# Altium PCB MP3_PCB.PcbDoc
Units mil, origin at the board's own origin, x right, y up, seen from the top; angles counter-clockwise.
Board outline 6000 x 4000 mil, 2 copper layers (Top Layer, Bottom Layer); 1 components, 0 nets, 64 pads, 0 vias.
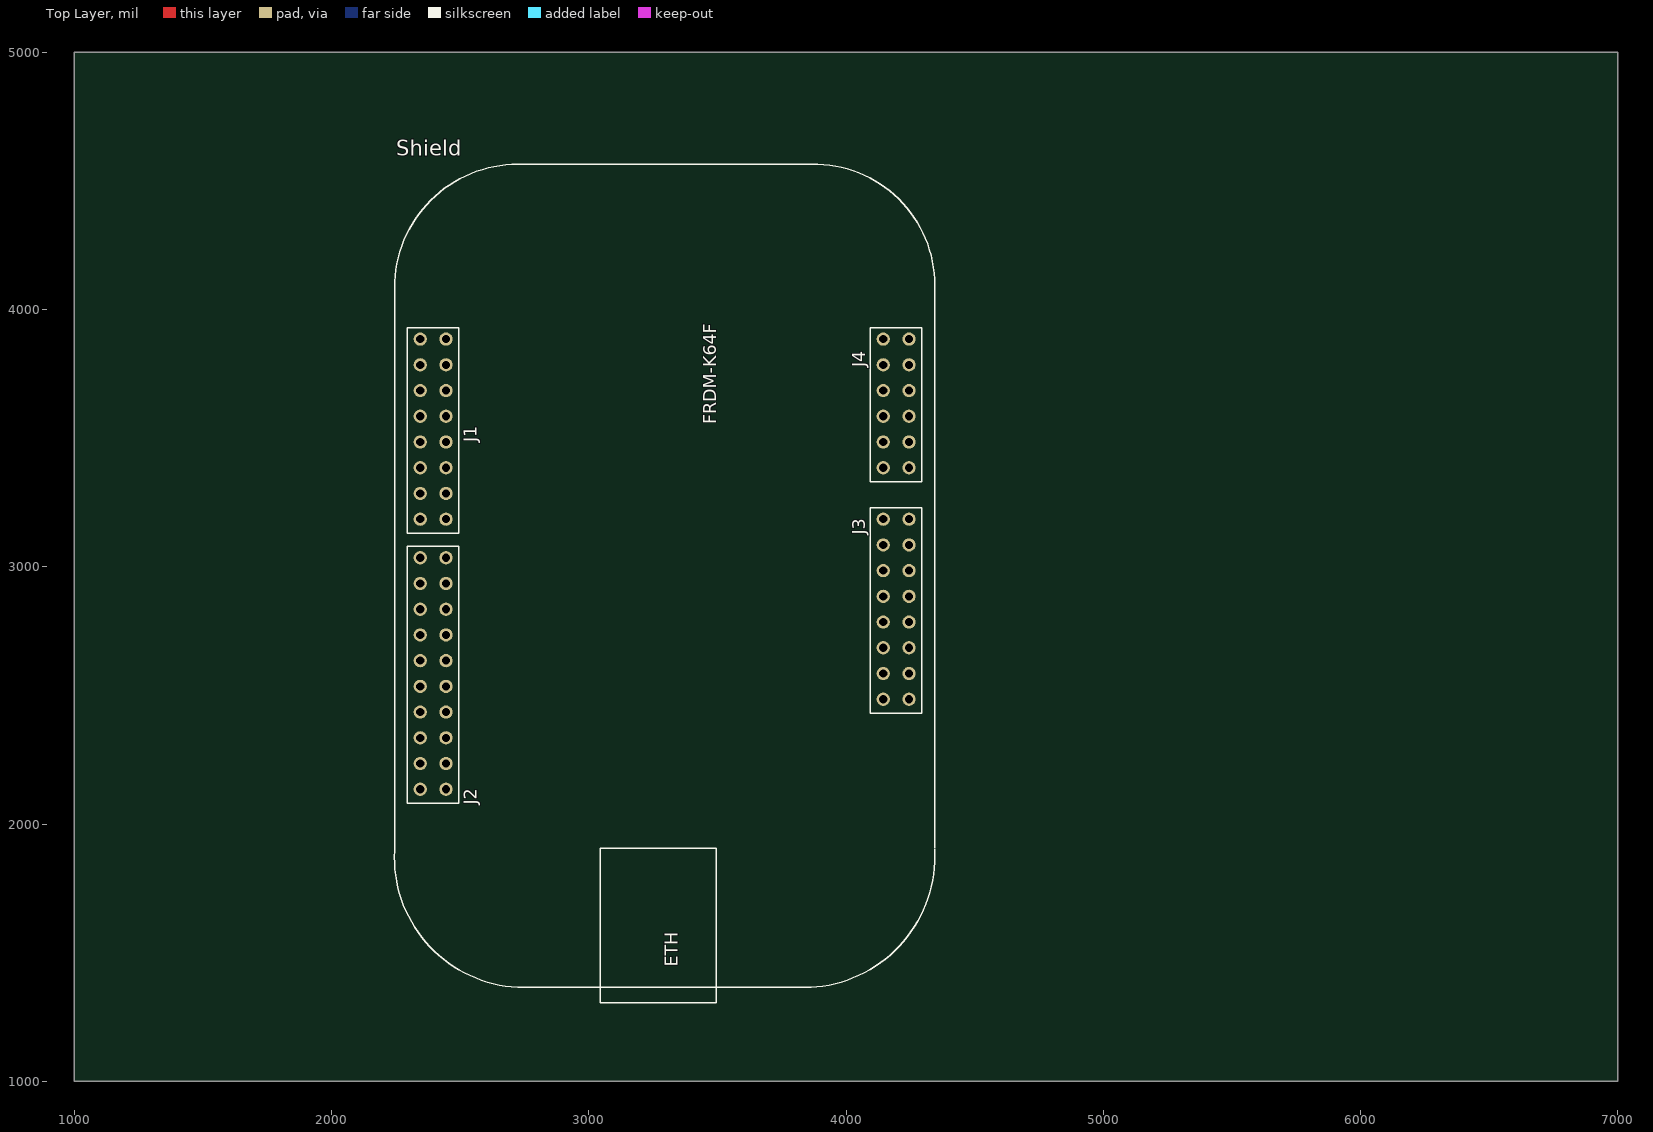
[diagram p0: Top Layer view]
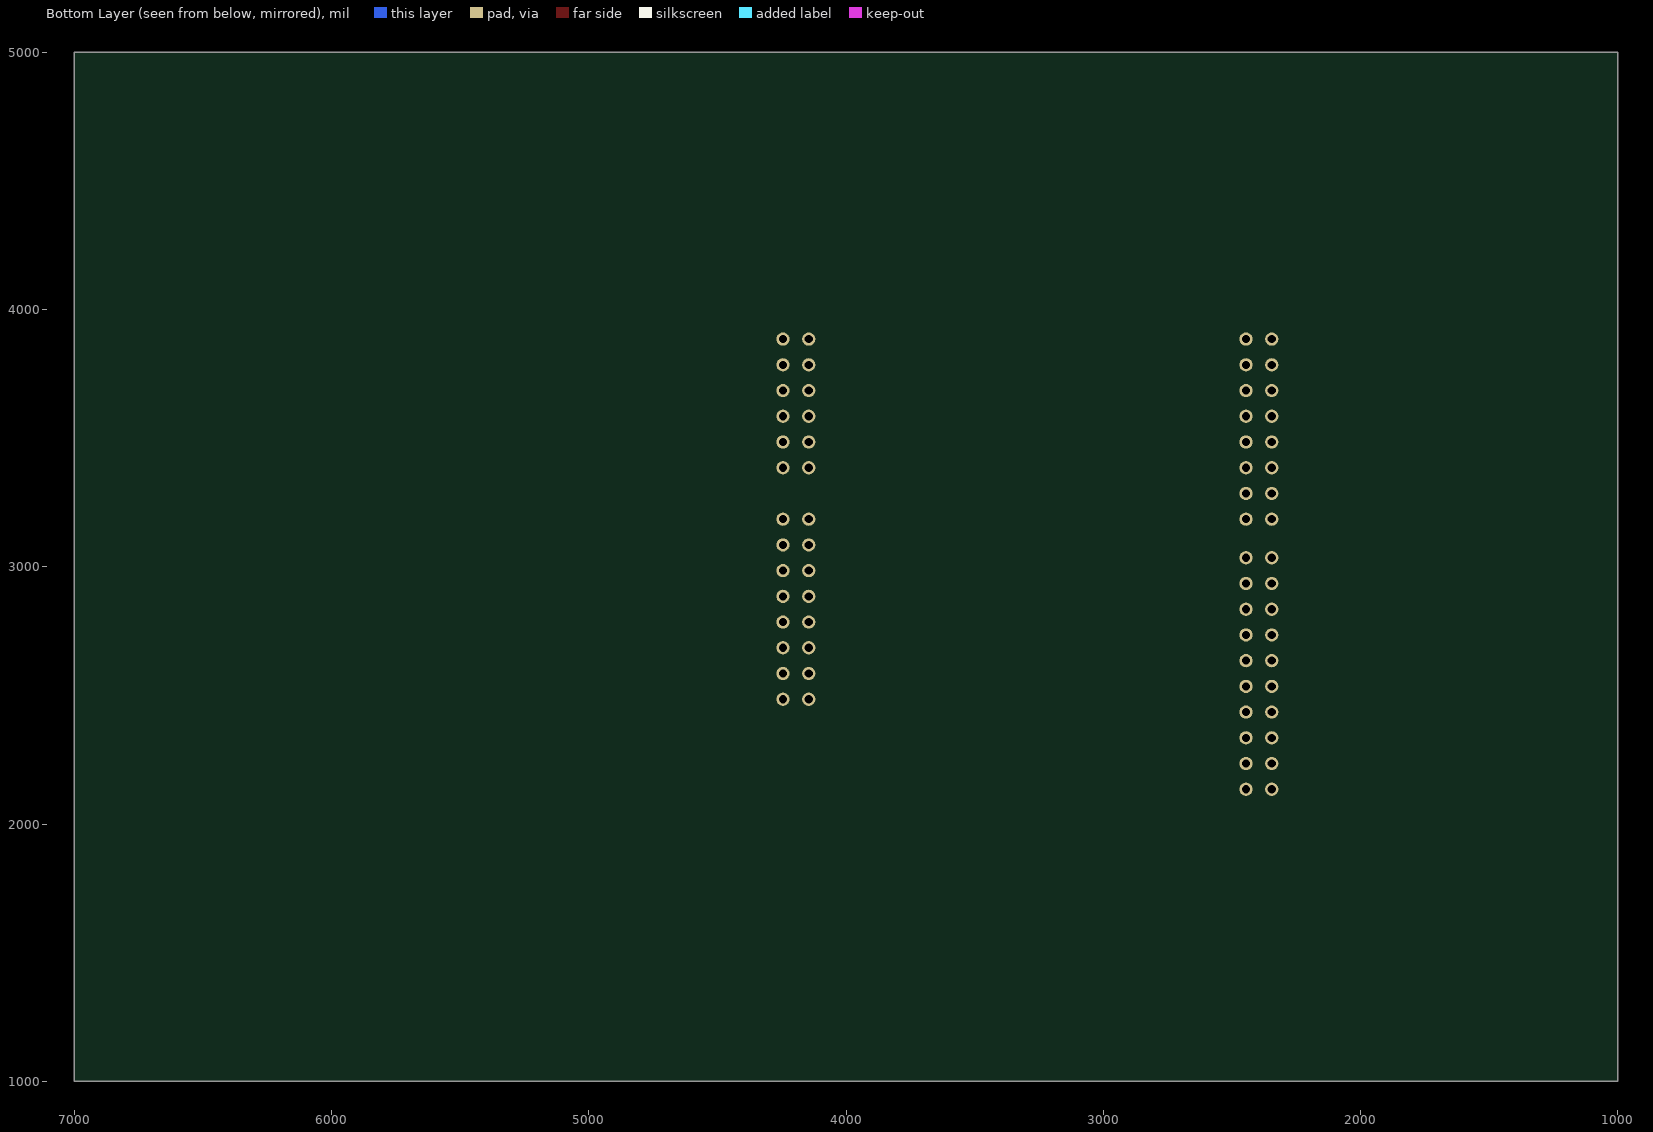
[diagram p1: Bottom Layer view, seen from below]

## Layer stack, top to bottom
Top Solder: solder mask 0.4, Solder Resist, Dk 3.5
Top Layer: signal copper 1.4
Dielectric 1: dielectric 12.6, FR-4, Dk 4.8
Bottom Layer: signal copper 1.4
Bottom Solder: solder mask 0.4, Solder Resist, Dk 3.5

## Board outline
1000,1000 7000,1000 7000,5000 1000,5000

## Design rules (kind name [scope] priority, off if disabled: settings)
Clearance [All] p1: gap=10 ignorepadtopadclearanceinfootprint=FALSE except(0: Arc-Hole Track-Hole SMDPad-Hole THPad-Hole Via-Hole Fill-Hole Poly-Hole Region-Hole Text-Hole)
PolygonConnect [All] p1: connectstyle=Relief reliefconductorwidth=10 reliefentries=4 polygonreliefangle="90 Angle" airgapwidth=10
RoutingVias [All] p1: holewidth=28 width=50 viastyle="Through Hole" minholewidth=28 minwidth=50 maxholewidth=28 maxwidth=50
SolderMaskExpansion [All] p1: expansion=4 istentingtop=FALSE
Width [All] p1: maxlimit=10 minlimit=10 preferedwidth=10
30 further rules are at their usual default settings.

## Components (designator, comment, footprint, x,y, rotation, side; value= is the part's Value field where it differs from the comment)
Shield "FRDM-K64F" FRDM-K64F 3295,2955 r90 top

## Footprints (in the part's own frame and the unit in brackets; to place one, negate y for a bottom-side part, rotate by r counter-clockwise, add the part's x,y. Pads: shape width x height; smd on the part's side, far side on the other; paste and mask are expansions set on the pad)
FRDM-K64F [mil]
  round 51.5 hole 31.5: J1-1(930,850) J1-2(930,950) J1-3(830,850) J1-4(830,950) J1-5(730,850) J1-6(730,950) J1-7(630,850) J1-8(630,950) J1-9(530,850) J1-10(530,950) J1-11(430,850) J1-12(430,950) J1-13(330,850) J1-14(330,950) J1-15(230,850) J1-16(230,950) J2-1(80,850) J2-2(80,950) J2-3(-20,850) J2-4(-20,950) J2-5(-120,850) J2-6(-120,950) J2-7(-220,850) J2-8(-220,950) J2-9(-320,850) J2-10(-320,950) J2-11(-420,850) J2-12(-420,950) J2-13(-520,850) J2-14(-520,950) J2-15(-620,850) J2-16(-620,950) J2-17(-720,850) J2-18(-720,950) J2-19(-820,850) J2-20(-820,950) J3-1(-470,-850) J3-2(-470,-950) J3-3(-370,-850) J3-4(-370,-950) J3-5(-270,-850) J3-6(-270,-950) J3-7(-170,-850) J3-8(-170,-950) J3-9(-70,-850) J3-10(-70,-950) J3-11(30,-850) J3-12(30,-950) J3-13(130,-850) J3-14(130,-950) J3-15(230,-850) J3-16(230,-950) J4-1(430,-850) J4-2(430,-950) J4-3(530,-850) J4-4(530,-950) J4-5(630,-850) J4-6(630,-950) J4-7(730,-850) J4-8(730,-950) J4-9(830,-850) J4-10(830,-950) J4-11(930,-850) J4-12(930,-950)
  silkscreen extent -1650,-1051 1610,1051

## Part data
Shield: "K24, K63, K64, mbed-Enabled Development Freedom Kinetis ARMÂ® CortexÂ®-M4 MCU 32-Bit Embedded Evaluation Board", Package=None, Availability=Unavailable, MF="NXP USA", MP=FRDM-K64F, Price=None, SnapEDA_Link=https://www.snapeda.com/parts/FRDM-K64F/NXP%20USA%20Inc./view-part/508270/?ref=snap

## Nets (pads, with @x,y where several pads share a name; then routed paths per layer and width w, separated by ;. In a path a pad name is that pad's centre, name@x,y a point inside that pad or via, vN(x,y) a via of type N, cw(c..) or ccw(c..) an arc to the next point about the centre after c; other vN are vias at no path point)
pads on no net: Shield.J1-1 Shield.J1-2 Shield.J1-3 Shield.J1-4 Shield.J1-5 Shield.J1-6 Shield.J1-7 Shield.J1-8 Shield.J1-9 Shield.J1-10 Shield.J1-11 Shield.J1-12 Shield.J1-13 Shield.J1-14 Shield.J1-15 Shield.J1-16 Shield.J2-1 Shield.J2-2 Shield.J2-3 Shield.J2-4 Shield.J2-5 Shield.J2-6 Shield.J2-7 Shield.J2-8 Shield.J2-9 Shield.J2-10 Shield.J2-11 Shield.J2-12 Shield.J2-13 Shield.J2-14 Shield.J2-15 Shield.J2-16 Shield.J2-17 Shield.J2-18 Shield.J2-19 Shield.J2-20 Shield.J3-1 Shield.J3-2 Shield.J3-3 Shield.J3-4 Shield.J3-5 Shield.J3-6 Shield.J3-7 Shield.J3-8 Shield.J3-9 Shield.J3-10 Shield.J3-11 Shield.J3-12 Shield.J3-13 Shield.J3-14 Shield.J3-15 Shield.J3-16 Shield.J4-1 Shield.J4-2 Shield.J4-3 Shield.J4-4 Shield.J4-5 Shield.J4-6 Shield.J4-7 Shield.J4-8 Shield.J4-9 Shield.J4-10 Shield.J4-11 Shield.J4-12

## Text inside footprints (layer, text, board x,y; h text height)
Shield: Top Overlay "J1" at 2565,3485 h50 r90; Top Overlay "J2" at 2565,2075 h50 r90; Top Overlay "J4" at 4075,3775 h50 r90; Top Overlay "J3" at 4075,3125 h50 r90; Top Overlay "ETH" at 3345,1445 h50 r90